# EAGLE board Final_PCB (EAGLE 8.6.2)
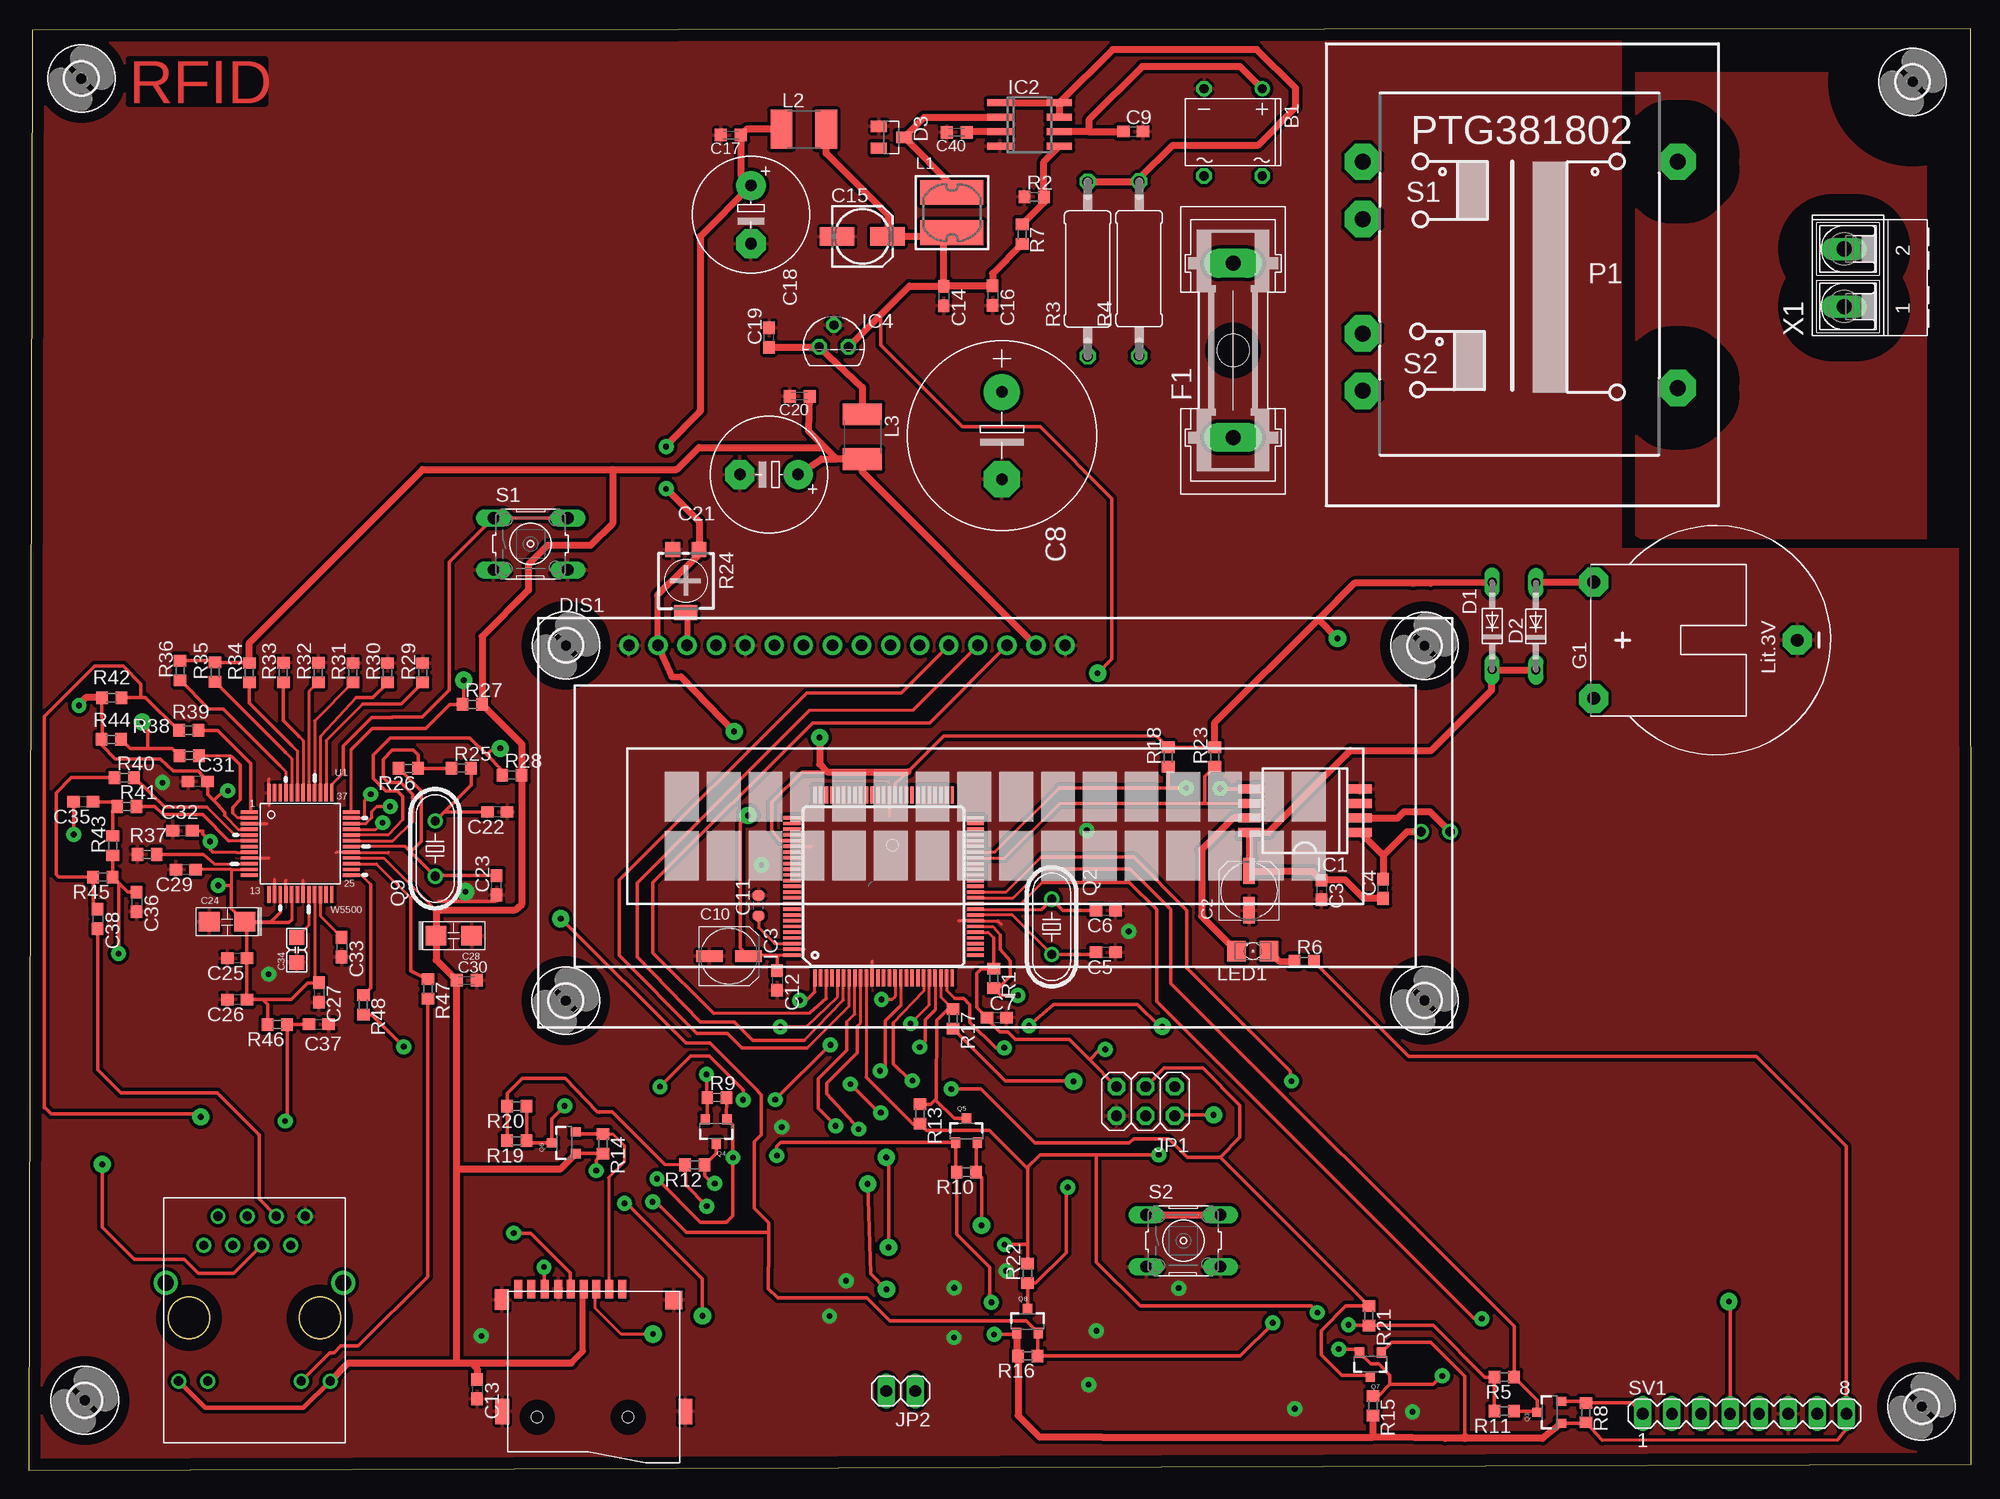
[diagram p0: board, top side]
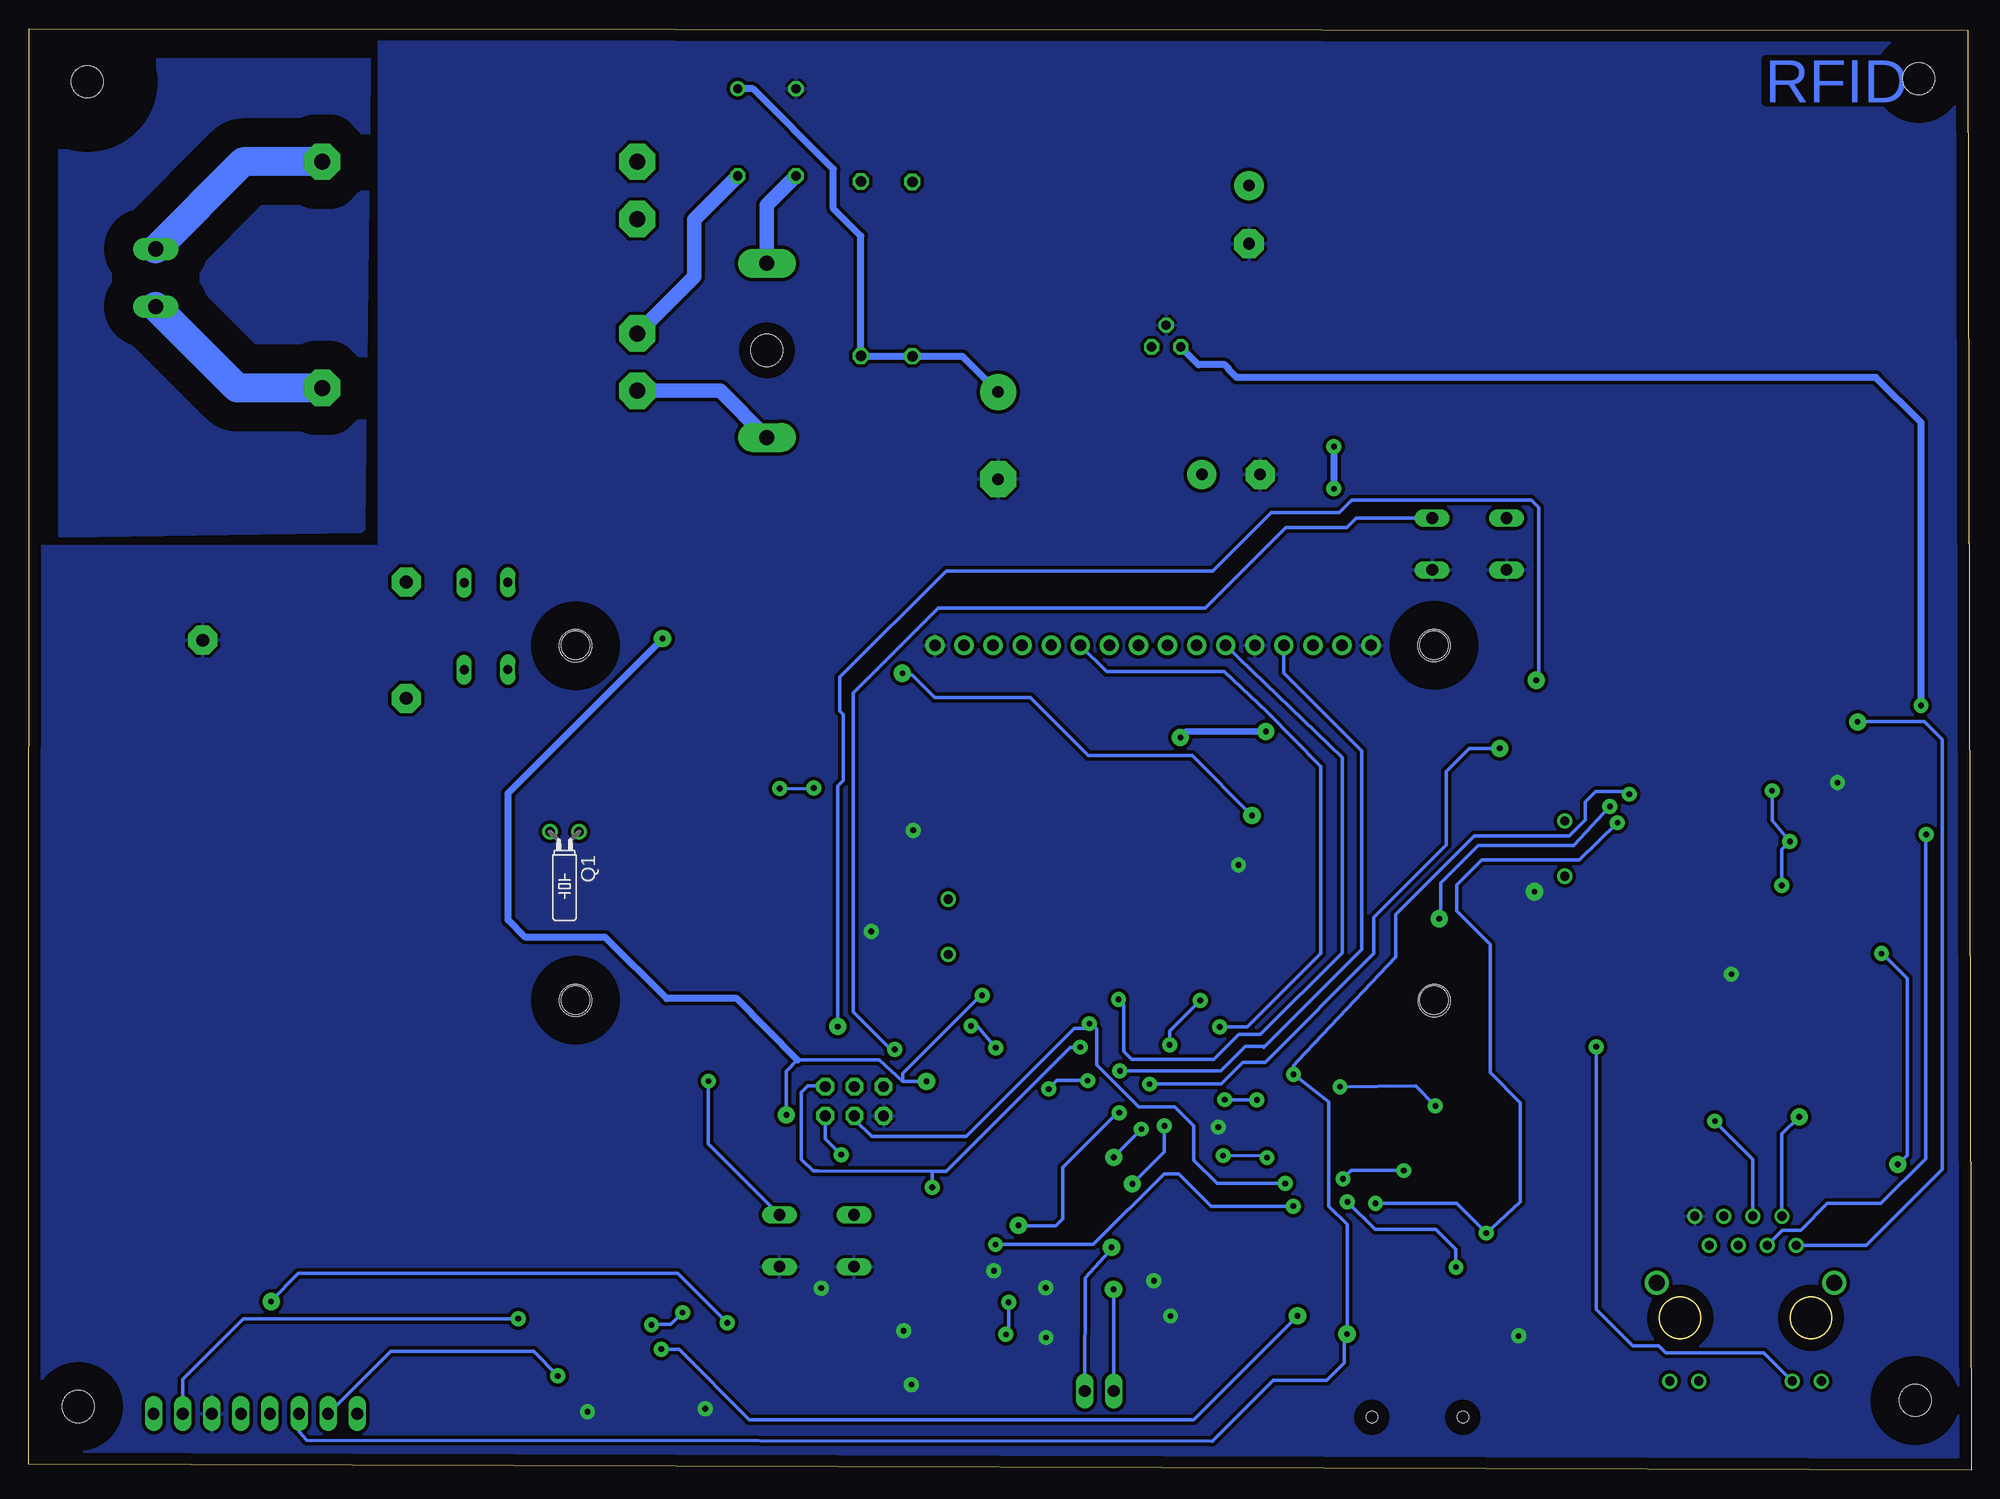
[diagram p1: board, bottom side, seen from below]

Size 169.7 x 125.96 mm. Coordinates in mm from the lower left corner, seen from the top.
Outline: 0,0 169.7,0.51 169.63,125.96 0.31,125.81 0,0
Copper layers (1*16): Top 0.035mm / dielectric 1.5mm / Bottom 0.035mm
Design rules "default *": minimum track width 0.25mm, minimum drill 0.5mm, track to track 8mil, track to pad 9mil, pad to pad 8mil, via to via 10mil, smd to smd 10mil, copper to edge 40mil, drill to drill 10mil, minimum pad ring 10mil, minimum via ring 8mil, stop-mask expansion 4mil, vias tented up to drill 0mil, thermal gap 10mil
Net classes: 1 power: width 0.152 mm, drill 0.61 mm, clearance 0.152 mm; 2 gnd: width 0.305 mm, drill 0.406 mm, clearance 0.203 mm; 3 power usb: width 0.508 mm, drill 0.406 mm, clearance 0.203 mm

## Footprints (pad centres in the part's own frame; a part is rotated, then mirrored left to right if it is on the bottom)
DB = drill 0.813: + -2.54,-3.81 | drill 0.813 octagon: - 2.54,-3.81; AC1 2.54,3.81; AC2 -2.54,3.81
UD-5X5,8_NICHICON = smd 2.3 x 1: + 1.725,0; - -1.7,0
C0603 = smd 1.1 x 1: 1 -0.85,0; 2 0.85,0
E7,5-16 = drill 1.016 pad 3.15: + -3.81,0 | drill 1.016 pad 3.15 octagon: - 3.81,0
C0603-ROUND = smd 0.898 x 1.1: 1 -0.889,0; 2 0.889,0
153CLV-0505 = smd 3 x 1.6: + 2.2,0; - -2.2,0
C0603K = smd 1.05 x 1.08: 1 -0.875,0; 2 0.875,0
E5-10,5 = drill 1.016 pad 2.54: + -2.54,0 | drill 1.016 pad 2.54 octagon: - 2.54,0
C-3216(TANTAL) = smd 1.8 x 1.7: 1 1.55,0; 2 -1.55,0
C-2012 = smd 1.3 x 1.3: P$1 -1.1,0; P$2 1.1,0
DO34-7 = drill 0.813 long: A 3.81,0; C -3.81,0
SOT23 = smd 1 x 1.4: 1 -0.95,-1.1; 2 0.95,-1.1; 3 0,1.1
TUXGR_16X2_R2 = drill 1 pad 1.676: 1 -32,15.5; 2 -29.46,15.5; 3 -26.92,15.5; 4 -24.38,15.5; 5 -21.84,15.5; 6 -19.3,15.5; 7 -16.76,15.5; 8 -14.22,15.5; 9 -11.68,15.5; 10 -9.14,15.5; 11 -6.6,15.5; 12 -4.06,15.5; 13 -1.52,15.5; 14 1.02,15.5; 15 3.56,15.5; 16 6.1,15.5 | hole 2.5: -37.5,-15.5; 37.5,-15.5; -37.5,15.5; 37.5,15.5
GSH15 = drill 1.321 pad 2.54 long: 1 -7.62,0; 2 7.62,0 | hole 2.794: 0,0
CR2032H = drill 1.118 pad 2.54 octagon: + 5.08,10.795; +@1 -5.08,10.795; - 0,-6.985
2,8 = hole 2.8: 0,0
SO8-7_5 = smd 0.8 x 2: 1 -1.905,-4.845; 2 -0.635,-4.845; 3 0.635,-4.845; 4 1.905,-4.845; 5 1.905,4.845; 6 0.635,4.845; 7 -0.635,4.845; 8 -1.905,4.845
SOIC8 = smd 0.6 x 2.2: 1 -1.905,-2.6; 2 -0.635,-2.6; 3 0.635,-2.6; 4 1.905,-2.6; 5 1.905,2.6; 6 0.635,2.6; 7 -0.635,2.6; 8 -1.905,2.6
TQFP100 = smd 1.5 x 0.3: 1 -8,6; 2 -8,5.5; 3 -8,5; 4 -8,4.5; 5 -8,4; 6 -8,3.5; 7 -8,3; 8 -8,2.5; 9 -8,2; 10 -8,1.5; 11 -8,1; 12 -8,0.5; 13 -8,0; 14 -8,-0.5; 15 -8,-1; 16 -8,-1.5; 17 -8,-2; 18 -8,-2.5; 19 -8,-3; 20 -8,-3.5; 21 -8,-4; 22 -8,-4.5; 23 -8,-5; 24 -8,-5.5; 25 -8,-6; 51 8,-6; 52 8,-5.5; 53 8,-5; 54 8,-4.5; 55 8,-4; 56 8,-3.5; 57 8,-3; 58 8,-2.5; 59 8,-2; 60 8,-1.5; 61 8,-1; 62 8,-0.5; 63 8,0; 64 8,0.5; 65 8,1; 66 8,1.5; 67 8,2; 68 8,2.5; 69 8,3; 70 8,3.5; 71 8,4; 72 8,4.5; 73 8,5; 74 8,5.5; 75 8,6 | smd 0.3 x 1.5: 26 -6,-8; 27 -5.5,-8; 28 -5,-8; 29 -4.5,-8; 30 -4,-8; 31 -3.5,-8; 32 -3,-8; 33 -2.5,-8; 34 -2,-8; 35 -1.5,-8; 36 -1,-8; 37 -0.5,-8; 38 0,-8; 39 0.5,-8; 40 1,-8; 41 1.5,-8; 42 2,-8; 43 2.5,-8; 44 3,-8; 45 3.5,-8; 46 4,-8; 47 4.5,-8; 48 5,-8; 49 5.5,-8; 50 6,-8; 76 6,8; 77 5.5,8; 78 5,8; 79 4.5,8; 80 4,8; 81 3.5,8; 82 3,8; 83 2.5,8; 84 2,8; 85 1.5,8; 86 1,8; 87 0.5,8; 88 0,8; 89 -0.5,8; 90 -1,8; 91 -1.5,8; 92 -2,8; 93 -2.5,8; 94 -3,8; 95 -3.5,8; 96 -4,8; 97 -4.5,8; 98 -5,8; 99 -5.5,8; 100 -6,8
TO92 = drill 0.813 octagon: 1 -1.27,0; 2 0,1.905; 3 1.27,0
2X03 = drill 0.95 pad 1.55 octagon: 1 -2.54,-1.27; 2 -2.54,1.27; 3 0,-1.27; 4 0,1.27; 5 2.54,-1.27; 6 2.54,1.27
1X02 = drill 1.016 long: 1 -1.27,0; 2 1.27,0
CD54 = smd 5.5 x 2.15: 1 0,1.75; 2 0,-1.75
L1812 = smd 1.9 x 3.4: 1 -1.95,0; 2 1.95,0
LED_1206 = smd 1.6 x 1.803: A -1.422,0; C 1.422,0
TC26H = drill 0.813: 1 -1.27,0; 2 1.27,0
HC49/S = drill 0.813: 1 -2.413,0; 2 2.413,0
SOT23-3 = smd 0.8 x 0.9: 1 -0.95,-1; 2 0.95,-1; 3 0,1.1
R0603 = smd 1 x 1.1: 1 -0.85,0; 2 0.85,0
0411/15 = drill 0.914 octagon: 1 -7.62,0; 2 7.62,0
RTRIM4G/J = smd 1.3 x 1.3: 1 -1.15,-2.75; 3 1.15,-2.75 | smd 2 x 1.3: 2 0,2.75
B3F-10XX = drill 1.016 long: 1 -3.251,2.261; 2 3.251,2.261; 3 -3.251,-2.261; 4 3.251,-2.261
MA08-1 = drill 1.016 long: 1 -8.89,0; 2 -6.35,0; 3 -3.81,0; 4 -1.27,0; 5 1.27,0; 6 3.81,0; 7 6.35,0; 8 8.89,0
VR12 = drill 1.397 pad 3.175 octagon: 1 5.817,13.437; 2 -13.945,13.437; 3 6.071,-14.072; 4 1.067,-14.072; 5 -8.941,-14.072; 6 -13.945,-14.072
W5500 = smd 1.5 x 0.3: 1 -4.45,2.75; 2 -4.45,2.25; 3 -4.45,1.75; 4 -4.45,1.25; 5 -4.45,0.75; 6 -4.45,0.25; 7 -4.45,-0.25; 8 -4.45,-0.75; 9 -4.45,-1.25; 10 -4.45,-1.75; 11 -4.45,-2.25; 12 -4.45,-2.75; 25 4.45,-2.75; 26 4.45,-2.25; 27 4.45,-1.75; 28 4.45,-1.25; 29 4.45,-0.75; 30 4.45,-0.25; 31 4.45,0.25; 32 4.45,0.75; 33 4.45,1.25; 34 4.45,1.75; 35 4.45,2.25; 36 4.45,2.75 | smd 0.3 x 1.5: 13 -2.75,-4.45; 14 -2.25,-4.45; 15 -1.75,-4.45; 16 -1.25,-4.45; 17 -0.75,-4.45; 18 -0.25,-4.45; 19 0.25,-4.45; 20 0.75,-4.45; 21 1.25,-4.45; 22 1.75,-4.45; 23 2.25,-4.45; 24 2.75,-4.45; 37 2.75,4.45; 38 2.25,4.45; 39 1.75,4.45; 40 1.25,4.45; 41 0.75,4.45; 42 0.25,4.45; 43 -0.25,4.45; 44 -0.75,4.45; 45 -1.25,4.45; 46 -1.75,4.45; 47 -2.25,4.45; 48 -2.75,4.45
RJ45 = drill 0.8: G+ 5.84,-6.305; G- 5.84,-3.765; GND -8.57,4.76; NC -6.03,3.5; P4 -8.57,-0.32; P5 -6.03,0.96; RD+ -6.03,-1.58; RD- -8.57,2.22; TD+ -6.03,-4.12; TD- -8.57,-2.86; Y+ 5.84,6.945; Y- 5.84,4.405 | drill 1.4: SHIELD1 -2.73,-7.425; SHIELD2 -2.73,8.065
C12075 = smd 0.7 x 1.6: 1 2.5,7.7; 2 1.35,7.7; 3 0.2,7.7; 4 -0.9,7.7; 5 -2,7.7; 6 -3.1,7.7; 7 -4.3,7.7; 8 -5.45,7.7; CD -6.6,7.7 | smd 1.2 x 1.8: GND@1 -8.05,6.77 | smd 1.2 x 2.2: GND@2 -8,-3; GND@4 8,-3 | smd 1.5 x 1.6: GND@3 6.99,6.75 | hole 1: -4.95,-3.5; 3,-3.5; 3,-3.5
AK500/2-H = drill 1.321 long: 1 -2.515,0; 2 2.515,0

## Placement (x,y rotation side)
B1  DF01S  [DB]  105.21,116.9 180 top
C2  4,7 uF  [UD-5X5,8_NICHICON]  106.61,50.63 90 top
C3  100n  [C0603]  112.93,50.7 270 top
C4  100n  [C0603]  118.32,50.8 90 top
C5  18p  [C0603]  94.09,45.24 180 top
C6  18p  [C0603]  94.09,48.9 180 top
C7  22p  [C0603]  84.56,39.55 0 top
C8  470u  [E7,5-16]  85.02,90.4 270 top
C9  100n  [C0603]  96.48,116.97 0 top
C10  22u  [UD-5X5,8_NICHICON]  61.17,44.91 0 top
C11  100n  [C0603-ROUND]  63.76,49.33 90 top
C12  100n  [C0603]  65.39,42.78 270 top
C13  100n  [C0603]  39.17,7.09 270 top
C14  100n  [C0603]  79.94,102.6 270 top
C15  47u  [153CLV-0505]  72.83,107.8 0 top
C16  10u  [C0603]  84.21,102.62 270 top
C17  100n  [C0603K]  61.35,116.67 180 top
C18  10u LOW ESR  [E5-10,5]  63.1,109.71 270 top
C19  10u  [C0603]  64.67,98.96 90 top
C20  100n  [C0603K]  67.34,93.83 180 top
C21  10u LOW ESR  [E5-10,5]  64.67,87 180 top
C22  18p  [C0603]  40.95,57.51 180 top
C23  18p  [C0603]  40.87,51.11 90 top
C24  10uF/16V  [C-3216(TANTAL)]  17.33,47.91 0 top
C25  100n  [C0603]  18.22,44.73 180 top
C26  100n  [C0603]  18.22,41.13 180 top
C27  100n  [C0603]  25.36,41.74 270 top
C28  10uF/16V  [C-3216(TANTAL)]  37.14,46.69 180 top
C29  100n  [C0603]  13.72,52.48 180 top
C30  100n  [C0603K]  38.26,42.8 0 top
C31  100n  [C0603]  14.79,60.18 180 top
C32  100n  [C0603]  13.44,55.86 180 top
C33  10n  [C0603]  27.34,45.7 270 top
C34  4.7uF  [C-2012]  23.42,45.45 90 top
C35  6.8n  [C0603]  4.78,58.4 180 top
C36  10n  [C0603]  9.43,49.66 270 top
C37  22n  [C0603]  25.36,38.97 0 top
C38  6.8n  [C0603]  6.03,48.16 270 top
C40  750p  [C0603K]  81.06,116.9 180 top
D1  BAT81  [DO34-7]  127.84,73.77 90 top
D2  BAT81  [DO34-7]  131.65,73.74 90 top
D3  BAS40  [SOT23]  75.37,116.46 270 top
DIS1  TUXGR_16X2_R2  [TUXGR_16X2_R2]  84.44,56.57 0 top
F1  1A  [GSH15]  105.21,97.85 90 top
G1  CR2032H  [CR2032H]  147.5,72.52 90 top
H1  MOUNT-HOLE2.8  [2,8]  165.36,5.57 0 top
H2  MOUNT-HOLE2.8  [2,8]  121.93,72.04 0 top
H3  MOUNT-HOLE2.8  [2,8]  4.91,6.1 0 top
H4  MOUNT-HOLE2.8  [2,8]  121.93,41.05 0 top
H5  MOUNT-HOLE2.8  [2,8]  46.92,41.03 0 top
H6  MOUNT-HOLE2.8  [2,8]  46.95,72.06 0 top
H7  MOUNT-HOLE2.8  [2,8]  164.57,121.32 0 top
H8  MOUNT-HOLE2.8  [2,8]  4.6,121.59 0 top
IC1  PCF8583T  [SO8-7_5]  111.49,57.61 90 top
IC2  MC34063AD  [SOIC8]  87.43,117.58 270 top
IC3  ATMEGA2560-16AU  [TQFP100]  74.68,51.01 90 top
IC4  MCP1700-3302E  [TO92]  70.34,98.15 0 top
JP1  3x2M  [2X03]  97.57,32.24 180 top
JP2  D5  [1X02]  76.18,6.91 180 top
L1  220 uH  [CD54]  80.65,109.89 0 top
L2  47uH 0,21A  [L1812]  67.72,117.17 0 top
L3  47uH/ 210mA  [L1812]  72.83,90.3 270 top
LED1  1206 SMD  [LED_1206]  106.94,45.34 180 top
Q1  32.768 KHz  [TC26H]  122.89,55.78 180 bottom
Q2  16 MHz  [HC49/S]  89.36,47.48 270 top
Q3  BSS138  [SOT23-3]  132.87,5.06 90 top
Q4  BSS138  [SOT23-3]  60.05,29.65 180 top
Q5  BSS138  [SOT23-3]  81.92,29.62 0 top
Q6  BSS138  [SOT23-3]  46.79,28.61 90 top
Q7  BSS138  [SOT23-3]  117.2,9.28 180 top
Q8  BSS138  [SOT23-3]  87.26,12.98 0 top
Q9  25 MHz  [HC49/S]  35.52,54.31 90 top
R1  10k  [R0603]  84.31,42.96 270 top
R2  1k  [R0603]  87.84,111.26 0 top
R3  1,5  [0411/15]  92.51,104.96 90 top
R4  1,5  [0411/15]  97.01,104.98 90 top
R5  4.7K  [R0603]  128.91,8.13 180 top
R6  330R  [R0603]  111.41,44.45 0 top
R7  3k  [R0603]  86.8,108.01 270 top
R8  10k  [R0603]  136.02,5.03 270 top
R9  10k  [R0603]  60.13,32.57 0 top
R10  10k  [R0603]  81.92,26.04 180 top
R11  10k  [R0603]  128.89,5.16 180 top
R12  10k  [R0603]  58.2,26.67 180 top
R13  10k  [R0603]  77.86,31.12 270 top
R14  10k  [R0603]  50.17,28.53 270 top
R15  10k  [R0603]  117.43,5.62 270 top
R16  10k  [R0603]  87.28,9.99 180 top
R17  4.7K  [R0603]  80.75,39.43 270 top
R18  10k  [R0603]  99.55,62.31 90 top
R19  4.7K  [R0603]  42.63,28.78 180 top
R20  10k  [R0603]  42.65,31.81 180 top
R21  10k  [R0603]  117.07,13.49 270 top
R22  10k  [R0603]  87.26,17.2 90 top
R23  10k  [R0603]  103.61,62.34 90 top
R24  10k  [RTRIM4G/J]  57.41,77.7 180 top
R25  0R  [R0603]  37.8,61.35 0 top
R26  1M  [R0603]  33.18,61.32 180 top
R27  10k  [R0603]  38.77,66.91 0 top
R28  10k  [R0603]  42.22,60.74 0 top
R29  10k  [R0603]  34.42,69.68 90 top
R30  10k  [R0603]  31.35,69.68 90 top
R31  10k  [R0603]  28.33,69.68 90 top
R32  10k  [R0603]  25.3,69.7 90 top
R33  10k  [R0603]  22.26,69.7 90 top
R34  10k  [R0603]  19.28,69.68 90 top
R35  10k  [R0603]  16.29,69.73 90 top
R36  10k  [R0603]  13.24,69.88 90 top
R37  12.4k 1%  [R0603]  10.34,53.8 0 top
R38  33R  [R0603]  14.03,62.44 0 top
R39  33R  [R0603]  13.98,64.65 0 top
R40  33R  [R0603]  8.36,60.51 0 top
R41  33R  [R0603]  8.59,57.99 0 top
R42  49R9 1%  [R0603]  7.25,67.49 180 top
R43  49R9 1%  [R0603]  7.35,54.56 90 top
R44  49R9 1%  [R0603]  7.22,63.86 180 top
R45  49R9 1%  [R0603]  6.48,51.82 180 top
R46  10R 1%  [R0603]  21.72,38.94 180 top
R47  330R  [R0603]  34.88,42.04 270 top
R48  330R  [R0603]  29.24,40.64 270 top
S1  SW3  [B3F-10XX]  43.85,80.93 0 top
S2  SW  [B3F-10XX]  100.87,20.05 0 top
SV1  RC522  [MA08-1]  149.89,4.93 0 top
TR1  PTG383002  [VR12]  130.61,100.39 270 top
U1  W5500  [W5500]  23.73,54.74 0 top
U$1  HR911105A  [RJ45]  19.4,13.63 270 top
U$2  MICROSD  [C12075]  49.37,8.13 0 top
X1  230V  [AK500/2-H]  158.6,104.2 90 top

## Library data of the parts
B1 = rectifier
C2-C10 C12-C23 C25-C27 C29-C33 C35-C38 C40 = rcl; SPICEPREFIX: C
C11 IC3 JP1 = SmartPrj
C24 C28 = CAP; SPICEPREFIX: C
C34 = CAP
D1-D3 = diode
DIS1 = display-lcd; OC_FARNELL: unknown; OC_NEWARK: unknown; SPICEPREFIX: X
F1 = fuse; MPN: 64900001039; OC_FARNELL: 1271673; OC_NEWARK: 02P0318
G1 = battery
H1-H8 = holes
IC1 = ds1307_pcf8583
IC2 = mc34063
IC4 = linear
JP2 = pinhead
L1 = inductor-sumida
L2 L3 = rcl; SPICEPREFIX: L
LED1 = eagle-ltspice; SPICEMODEL: NONE; SPICEPREFIX: D; SPICETYPE: diode
Q1 = crystal; OC_FARNELL: unknown; OC_NEWARK: unknown
Q2 Q9 = crystal; OC_FARNELL: 1667008; OC_NEWARK: unknown
Q3-Q8 = SparkFun
R1-R23 R25-R48 = rcl; SPICEPREFIX: R
R24 = resistor
S1 S2 = switch-omron; MPN: B3F-1000; OC_FARNELL: 176432; OC_NEWARK: 36M3542
SV1 = con-lstb; OC_FARNELL: unknown; OC_NEWARK: unknown
TR1 = trafo_inżynierka; SPICEPREFIX: X
U1 = W5500
U$1 = HR911105A
U$2 = micro-sd
X1 = con-ptr500; OC_FARNELL: unknown; OC_NEWARK: unknown

## Nets
3.3_CS_ETH(D10): Q5.2 R10.1 R28.1 U1.32
3.3_CS_RFID: Q3.2 R8.1 SV1.1
3.3_CS_SD(D4): Q6.2 R14.1 U$2.2
3.3_MISO: Q8.2 R16.1 SV1.4 U1.34 U$2.7
3.3_MOSI: Q4.2 R9.1 SV1.3 U1.35 U$2.3
3.3_SCK: Q7.2 R15.1 SV1.2 U1.33 U$2.5
5_CS_ETH(D10): IC3.23 Q5.3 R13.1 R17.1
5_CS_SD(D4): IC3.1 Q6.3 R19.1 R20.1
5_MISO: IC3.22 JP1.1 Q8.3 R22.1
5_MOSI: IC3.21 JP1.4 Q4.3 R12.1
5_SCK: IC3.20 JP1.3 Q7.3 R21.1
+3V3: C19.1 C24.1 C25.1 C26.1 C27.1 C29.1 C31.1 C32.1 IC4.1 L3.1 R42.2 R44.2 R46.2 U1.4 U1.8 U1.11 U1.15 U1.17 U1.21
+5V: C10.+ C12.1 C14.1 C15.+ C16.1 IC3.100 IC4.3 L1.2 L2.2 R7.2
ALED: R47.1 U1.27
AREF: C11.1 IC3.98
CS_RFID: IC3.36 Q3.3 R5.1 R11.1
D4: DIS1.11 IC3.5
D5: DIS1.12 IC3.7
D6: DIS1.13 IC3.6
D7: DIS1.14 IC3.3
E: DIS1.6 IC3.15
GND: B1.- C2.- C3.2 C5.1 C6.1 C7.2 C8.- C9.2 C10.- C11.2 C12.2 C13.2 C14.2 C15.- C16.2 C17.2 C18.- C19.2 C20.2 C21.- C22.1 C23.1 C24.2 C25.2 C26.2 C27.2 C28.2 C29.2 C30.2 C31.2 C32.2 C33.2 C34.P$1 C36.2 C37.2 C40.2 D3.1 DIS1.1 DIS1.5 DIS1.16 G1.- IC1.4 IC2.4 IC3.11 IC3.32 IC3.62 IC3.81 IC3.99 IC4.2 JP1.6 R2.1 R24.3 R29.2 R30.2 R31.2 R32.2 R33.2 R37.1 S1.3 S1.4 S2.3 S2.4 SV1.6 U1.3 U1.9 U1.14 U1.16 U1.19 U1.29 U1.48 U$1.GND U$2.6 U$2.GND@1 U$2.GND@2 U$2.GND@3 U$2.GND@4
INT5: IC3.24 R27.1 U1.36
LLED: R48.1 U1.25
N$1: IC1.7 LED1.C
N$2: R29.1 U1.38
N$3: IC2.5 R2.2 R7.1
N$4: IC2.1 IC2.7 IC2.8 R3.2 R4.2
N$5: D3.3 IC2.2 L1.1
N$6: C40.1 IC2.3
N$7: TR1.1 X1.1
N$8: TR1.2 X1.2
N$9: B1.AC1 F1.2
N$10: B1.AC2 TR1.4
N$11: F1.1 TR1.3
N$12: B1.+ C8.+ C9.1 IC2.6 R3.1 R4.1
N$13: R47.2 U$1.Y-
N$14: R41.2 U1.6
N$15: DIS1.3 R24.2
N$16: R30.1 U1.39
N$17: R31.1 U1.40
N$18: C22.2 Q9.2 R25.2
N$19: IC3.9 JP2.1
N$20: IC3.8 JP2.2
N$21: R48.2 U$1.G-
N$26: IC3.37 S2.1 S2.2
N$27: C4.2 IC1.1 Q1.1
N$28: IC1.2 Q1.2
N$29: D2.A G1.+
N$31: C2.+ C3.1 C4.1 D1.C D2.C IC1.8
N$41: R32.1 U1.41
N$42: R33.1 U1.42
N$43: R34.1 U1.43
N$44: R35.1 U1.44
N$45: R36.1 U1.45
N$46: C34.P$2 U1.20
N$47: C33.1 U1.22
N$48: R37.2 U1.10
N$49: C37.1 R46.1 U$1.P4
N$50: C35.2 U$1.RD+
N$51: C38.2 U$1.RD-
N$52: C36.1 R43.1 R45.1 U$1.P5
N$54: LED1.A R6.1
N$58: R25.1 R26.1 U1.31
N$60: R40.2 U1.5
N$61: R38.2 U1.2
N$62: R39.2 U1.1
N$63: C23.2 Q9.1 R26.2 U1.30
RESET: C7.1 IC3.30 JP1.5 R1.1 S1.1 S1.2 U1.37
RESET_RFID: IC3.35 SV1.7
RS: DIS1.4 IC3.16
RXN: C38.1 R40.1 R45.2
RXP: C35.1 R41.1 R43.2
SCL: IC1.6 IC3.43 R23.1
SDA: IC1.5 IC3.44 R18.1
TXN: R39.1 R42.1 U$1.TD-
TXP: R38.1 R44.1 U$1.TD+
V+: C13.1 C20.1 C21.+ C28.1 C30.1 DIS1.15 L3.2 Q3.1 Q4.1 Q5.1 Q6.1 Q7.1 Q8.1 R6.2 R8.2 R9.2 R10.2 R14.2 R15.2 R16.2 R27.2 R28.2 R34.2 R35.2 R36.2 SV1.8 U1.28 U$1.G+ U$1.Y+ U$2.4
VDD: C17.1 C18.+ D1.A DIS1.2 IC3.10 IC3.31 IC3.61 IC3.80 JP1.2 L2.1 R1.2 R5.2 R11.2 R12.2 R13.2 R17.2 R18.2 R19.2 R20.2 R21.2 R22.2 R23.2 R24.1
XTAL1: C6.2 IC3.34 Q2.1
XTAL2: C5.2 IC3.33 Q2.2

## Tracks (layer width: path | path; a pad name or v marks a point on that pad's centre or on a via)
3.3_CS_ETH(D10)  (via drill 0.5 pad 1.3, 0.5 pad 1.5)
  Top 0.25: 32.67,56.88 31.41,55.49 U1.32
  Top 0.305: R28.1 41.37,61.15 40.01,62.51 | 40.01,62.51 38.54,63.99 31.6,63.99 30.1,62.49 30.1,60.43 31.2,59.34 32.21,59.34 32.67,58.88 32.67,56.88 | Q5.2 82.77,28.52 R10.1 83.24,25.57 v83.24,21.39 | 40.01,62.51 40.57,63.07 v41.2,63.07 | v71.79,33.74 74.29,31.23 v74.44,31.23
  Bottom 0.305: v41.2,63.07 43.85,63.07 45.85,61.07 45.85,54.64 52.2,48.29 52.2,45.14 61.7,35.64 63.63,35.64 65.51,33.76 71.61,33.74 v71.79,33.74 | v83.24,21.39 83.24,21.34 79.99,21.34 79.36,21.98 79.36,26.47 74.59,31.23 v74.44,31.23
3.3_CS_RFID
  Top 0.305: SV1.1 140.05,5.88 R8.1 135.9,6.01 Q3.2
3.3_CS_SD(D4)
  Top 0.254: R14.1 51.02,29.38 52.05,28.35 52.05,26.96 50.66,25.57 50.66,15.89 U$2.2
  Top 0.305: R14.1 47.97,29.38 Q6.2
3.3_MISO  (via drill 0.5 pad 1.3, 0.5 pad 1.5)
  Top 0.25: U1.34 29.46,56.49 29.98,57.02 29.98,57.55 30.43,57.99 30.64,57.99
  Top 0.254: U$2.7 45.07,15.88 45.02,15.93
  Top 0.305: 30.64,57.99 v31.58,57.99 | 64.65,20.77 64.65,21.62 63.38,22.89 63.38,28.68 64.01,29.32 64.01,32.8 63.38,33.43 59.52,37.34 57.39,37.34 v46.49,48.19 | 64.65,20.77 64.65,17.77 64.62,17.75 64.62,15.85 65.44,15.04 73.21,15.04 75.22,13.03 87.15,13.03 Q8.2 88.13,11.91 R16.1 105.85,9.99 108.74,12.88 | 108.84,12.98 108.74,12.88 | 108.74,12.88 v108.67,12.88 | v148.52,14.74 148.62,14.64 SV1.4 | 64.65,20.77 57.45,20.77 54.77,23.45 v54.5,23.45 54.37,23.45 54.35,23.43 | 45.02,15.93 v45.02,17.74
  Bottom 0.305: v31.58,57.99 34.73,54.59 43.09,54.59 46.36,51.31 46.36,48.32 v46.49,48.19 | v108.67,12.88 112.98,17.2 146.13,17.2 148.57,14.76 148.55,14.76 v148.52,14.74 | v54.5,23.45 52.09,21.04 46.78,21.04 45.04,19.3 45.04,17.64 v45.02,17.74
3.3_MOSI  (via drill 0.5 pad 1.3, 0.5 pad 1.5)
  Top 0.25: U1.35 29.16,56.99 29.37,57.21 29.37,58.56 v29.88,59.06
  Top 0.254: v54.54,11.89 54.53,11.91 51.73,11.91 49.51,14.13 49.51,15.77 U$2.3
  Top 0.305: 59.08,32.37 R9.1 | R9.1 59.28,30.82 Q4.2 | v59.21,34.57 59.26,32.61 R9.1
  Bottom 0.305: SV1.3 146.08,3.36 145.4,2.6 66.3,2.52 60.97,7.85 56.29,7.85 54.77,9.38 54.77,11.46 54.62,11.61 v54.54,11.89 54.54,21.47 56.12,23.04 56.12,32.19 v59.21,34.57 59.19,35.39 58.83,35.77 50.3,44.84 50.3,48.57 43.44,55.43 35.13,55.43 33.74,56.82 33.74,58.37 32.82,59.29 30.1,59.29 v29.88,59.06
3.3_SCK  (via drill 0.5 pad 1.3, 0.5 pad 1.5)
  Top 0.25: U1.33 30.34,55.99 v30.92,56.57
  Top 0.305: 118.9,7.5 118.9,8.31 117.94,9.28 117.25,9.28 Q7.2 115.96,10.57 v114.43,10.57 | 118.9,7.5 117.87,6.47 R15.1 | 118.9,7.5 122.71,7.5 123.63,8.41 v123.48,8.23 | v42.38,20.72 43.85,20.72 47.31,17.26 47.31,15.89 U$2.5 | v58.86,13.49 58.86,16.7 52.24,23.32 v52.05,23.32
  Bottom 0.305: v30.92,56.57 34.27,53.32 42.78,53.32 44.96,51.13 44.96,48.87 42.04,45.95 42.04,34.75 39.4,32.11 39.42,23.43 41.83,21.16 42.19,20.81 42.24,20.81 42.33,20.72 | 58.73,13.57 58.83,13.47 v58.86,13.49 67.93,4.42 106.74,4.42 112.88,10.57 v114.43,10.57 | v123.48,8.23 125.56,10.39 138.08,10.39 SV1.2 | 42.33,20.72 v42.38,20.72 | v52.05,23.32 44.93,23.32 42.33,20.72
5_CS_ETH(D10)
  Top 0.25: IC3.23 79.69,41.34 R17.1
  Top 0.305: R17.1 80.31,40.28 79.33,39.3 79.33,37.75 79.28,34.17 79.28,32.45 79.2,32.37 | R13.1 78.8,31.97 79.2,32.37 | 79.2,32.37 80.85,30.72 Q5.3
5_CS_SD(D4)  (via drill 0.5 pad 1.3)
  Top 0.25: 68.68,41.81 IC3.1
  Top 0.305: R20.1 43.5,28.81 R19.1 43.66,28.61 Q6.3 45.69,30.71 v46.82,31.83 | v70.03,37.16 v65.22,32.38 65.21,32.36 | v55.15,33.51 57.84,36.2 59.44,36.2 62.41,33.23 v62.41,32.36 | v67.37,41.05 67.93,41.05 68.68,41.81
  Bottom 0.305: v46.82,31.83 48.55,33.56 v55.15,33.51 | v62.41,32.36 64.93,32.36 65.18,32.39 v65.22,32.38 | v70.03,37.16 70.03,38.38 v67.37,41.05
5_MISO  (via drill 0.5 pad 1.3)
  Top 0.25: IC3.22 79.18,40.22
  Top 0.305: Q8.3 R22.1 87.98,16.35 90.63,19 90.63,24.59 v90.76,24.72 | 79.18,40.22 78.31,39.35 78.31,37.44 v77.83,36.96
  Bottom 0.305: JP1.1 100.16,33.56 101.66,33.56 102.22,33 102.2,30.28 102.2,27.17 101.17,26.14 100.77,26.14 90.76,26.1 | v77.83,36.96 78.7,36.96 89.55,26.1 90.76,26.1 | v90.76,24.72 90.76,26.1
5_MOSI  (via drill 0.5 pad 1.3)
  Top 0.25: IC3.21 78.68,40.66 v77.04,39.02
  Top 0.305: Q4.3 60.05,27.68 R12.1 59.05,25.7 59.67,25.05 v59.93,25.05
  Bottom 0.305: JP1.4 97.57,30.66 96.07,29.16 87.79,29.16 78.36,38.59 77.48,38.59 v77.04,39.02 76.87,39.02 76.41,38.56 76.41,35.41 72.73,31.73 69.58,31.73 67.93,30.08 67.93,27.08 65.89,25.05 v59.93,25.05
5_SCK  (via drill 0.5 pad 1.3)
  Top 0.25: IC3.20 78.18,41.86 75.52,39.08
  Top 0.305: JP1.3 99.19,35.13 102.55,35.13 105.8,31.88 105.8,29.07 104.07,27.35 | v77.2,34.04 77.02,34.04 75.55,35.51 75.52,39.08 | Q7.3 117.09,8.29 114.71,8.29 112.91,10.09 112.91,12.2 115.06,14.34 R21.1 104.07,27.35 | 104.07,27.35 101.19,27.35 99.57,28.96 96.53,28.96 96.14,28.58 87.89,28.58 83.17,33.3 v80.6,33.3
  Bottom 0.305: v80.6,33.3 80.6,33.33 79.89,34.04 v77.2,34.04
230V
  pour Bottom (isolate 2.54): 140.37,125.4 169.27,125.13 169.45,124.95 169.45,81.92 140.77,82.35 140.24,125.46
+3V3  (via drill 0.5 pad 1.3)
  Top 0.25: U1.15 21.98,48.75 | U1.17 22.98,48.1 | U1.21 24.98,42.96 | 17.69,52.49 17,52.49 C29.1 | U1.8 18.16,53.99 18.14,54.01 16.1,54.01 | 17.15,57.21 18.3,55.99 U1.4 | 17.69,52.49 17.69,51.08 | 17.69,52.49 U1.11
  Top 0.305: 21.98,48.75 21.14,47.91 C24.1 | 22.98,48.1 22.74,47.86 18.93,47.86 C24.1 | C24.1 19.07,47.72 C25.1 C26.1 20.45,41.13 | 24.98,42.96 C27.1 24.4,42.59 22.94,41.13 20.45,41.13 | 17.15,57.21 17.15,57.47 16.48,58.21 16.19,58.51 | C24.1 17.69,49.1 17.69,51.08 v16.57,51.08 | 20.45,41.13 20.87,40.71 R46.2 | R42.2 6.45,63.94 R44.2 6.37,63.36 7.58,62.16 11.51,62.16 12.66,61.09 14.8,61.09 C31.1 15.64,59.06 16.19,58.51 | C32.1 15.22,55.86 15.22,55.61 15.88,54.94 v15.86,54.94 15.86,54.25 16.1,54.01 | 16.19,58.51 17.05,59.36 v17.41,59.36
  Top 0.61: C19.1 68.32,98.11 IC4.1 72.83,94.59 L3.1 | R42.2 5.01,67.49 4.45,66.93 4.45,66.86 v4.4,66.81
  Bottom 0.305: v17.41,59.36 17.41,56.75 v15.86,54.94 16.57,54.23 v16.57,51.08
  Bottom 0.61: IC4.1 67.52,96.6 65.21,96.6 64.88,96.27 64.88,96.17 64.19,95.48 8.34,95.48 4.4,91.55 v4.4,66.81
+5V  (via drill 0.5 pad 1.5)
  Top 0.25: 62.99,45.01 65.59,45.01 | 65.59,45.01 IC3.100 | 65.59,45.01 65.39,44.8
  Top 0.305: 62.99,45.01 C10.+ 62.16,45.65 62.16,56.52 v62.85,57.21 | 65.39,44.8 C12.1 | v93.38,69.63 94.62,70.87 94.62,84.92 88.37,91.17 81.54,91.17 74.42,98.29 74.42,100.96
  Top 0.61: R7.2 84.21,104.56 C16.1 79.97,103.47 | 79.97,103.47 C14.1 79.94,107.42 L1.2 80.32,107.8 C15.+ 75.03,109.69 69.65,115.07 69.67,115.09 L2.2 | IC4.3 74.42,100.96 76.93,103.47 79.97,103.47
  Bottom 0.305: v62.85,57.21 68.08,62.44 77.15,62.44 82.23,67.52 90.53,67.52 92.51,69.5 93.28,69.5 93.28,69.52 v93.38,69.63
ALED
  Top 0.25: U1.27 30.38,52.99 33.38,49.99
  Top 0.305: R47.1 33.38,43.63 33.38,49.99
AREF
  Top 0.25: 63.76,47.93 63.76,47.41 65.16,46.01 IC3.98
  Top 0.305: C11.1 63.76,47.93
CS_RFID
  Top 0.25: IC3.36 86,50.01 88.53,52.53
  Top 0.305: R11.1 131.67,5.16 Q3.3 131.77,6.12 R5.1 129.76,12.57 99.78,42.55 99.78,49 98.91,49.86 98.81,49.97 96.25,52.53 88.53,52.53
D4  (via drill 0.5 pad 1.3)
  Top 0.25: 67.98,38.77 70.67,41.33 70.67,41.62 IC3.5
  Top 0.305: v65.66,38.74 67.98,38.77
  Bottom 0.305: DIS1.11 75.54,69.78 65.26,69.8 61.49,66.24 56.83,61.5 56.85,45.14 63.25,38.74 v65.66,38.74
D5
  Top 0.25: 68.03,36.91 71.68,40.57 IC3.7
  Top 0.305: DIS1.12 76.23,67.92 67.95,67.92 51.59,51.57 51.59,44.99 58.34,38.18 61.04,38.18 62.31,36.91 68.03,36.91
D6
  Top 0.25: 67.77,37.55 71.18,41.08 71.18,42.94
  Top 0.305: DIS1.13 77.27,66.43 68.2,66.37 53.14,51.31 53.14,44.84 58.66,39.17 61.63,39.17 63.25,37.55 67.77,37.55 | 71.18,42.94 IC3.6
D7
  Top 0.25: 69.68,41.23 IC3.3
  Top 0.305: DIS1.14 78.69,65.31 68.51,65.31 54.54,51.34 54.54,45.22 59.85,39.91 68.25,39.93 69.68,41.23
D230V
  pour Top (isolate 3.81): 140.39,125.86 169.37,125.89 169.58,125.68 169.58,81.44 169.55,81.49 140.9,81.49 140.49,81.77 140.49,125.25 140.44,125.79
E  (via drill 0.5 pad 1.3)
  Top 0.25: IC3.15 75.68,41.42 75.39,41.13
  Top 0.305: 75.39,41.13 v74.5,41.13
  Bottom 0.305: DIS1.6 54.97,62.27 54.97,62.26 54.97,45.22 62.11,38.08 63.99,38.08 66.17,35.89 73.34,35.89 74.02,36.58 74.02,40.64 v74.5,41.13
GND  (via drill 0.5 pad 1.3, 0.5 pad 1.5)
  Top 0.25: U1.3 20.81,56.49 | U1.9 21,53.5 | IC3.99 67.76,45.51 | 31.44,53.99 U1.29 26.88,53.99 26.83,53.95 | IC3.62 75.18,57.12 | 81.23,48.01 IC3.32 84.67,48.01 84.97,47.71 | U1.14 21.48,51.64 | U1.16 22.48,51.56 | U1.19 23.98,51.57 | IC3.11 73.68,44.45 | IC3.81 68.33,54.51 | 21.01,60.42 20.98,60.38 U1.48 20.98,58.07
  Top 0.305: 35.8,49.71 40.73,49.71 | 73.68,44.45 73.69,44.45
  other vias: 80.83,11.59 100.46,15.91 38.16,50.55 96.09,47.07 92.44,55.91 93.28,12.17 92.59,7.47 110.6,5.36 80.85,15.93 71.41,16.54 69.96,13.47 65.79,29.98 11.69,60.08 20.96,43.34 120.88,5.11 64.01,52.89 39.55,11.73 85.38,17.42
  pour Top (isolate 0.305): 0.31,125.86 139.02,125.86 139.02,80.42 169.65,80.42 169.56,0.01 0.17,0.01 0.26,125.73
  pour Bottom (isolate 0.305): 139.07,125.38 139.07,80.7 169.73,80.7 169.73,-0.1 0.03,-0.1 0.03,125.96 139.12,125.96 139.12,125.35
INT5  (via drill 0.5 pad 1.3, 0.5 pad 1.5)
  Top 0.25: U1.36 28.17,62.97 | IC3.24 80.18,41.93 80.88,41.23
  Top 0.305: U1.36 | 28.17,62.97 30,64.8 34.68,64.8 36.78,66.91 R27.1 38.01,67 v38.01,69.02 | 80.88,41.23 81.67,41.23 82.23,40.64 82.23,39.12 84.49,36.91 v85.22,36.91 | v87.38,38.82 89.54,40.7 96.86,40.7 98.79,38.77 v99.02,38.77
  Bottom 0.305: v99.02,38.77 99.02,59.8 98.53,60.28 98.53,66.04 98.84,66.35 98.84,69.3 89.57,78.57 66.25,78.57 61.14,83.67 55.2,83.67 54.11,84.76 38.44,84.76 37.78,84.1 37.78,69.25 v38.01,69.02 | v87.38,38.82 86.85,38.82 v85.22,36.91
LLED
  Top 0.25: U1.25 29.07,51.99 29.9,51.16
  Top 0.305: R48.1 29.9,42.16 29.9,51.16
N$1
  Top 0.61: IC1.7 105.21,56.98 102.47,54.23 102.47,48.39 LED1.C
N$2
  Top 0.25: 29.16,66.93 25.98,63.75 U1.38
  Top 0.305: R29.1 32.53,66.93 29.16,66.93
N$3
  Top 0.61: IC2.5 88.69,114.33 R2.2 88.69,110.75 R7.1
N$4
  Top 0.61: IC2.1 IC2.8 | IC2.8 IC2.7 | R3.2 96.98,112.58 | 96.98,112.58 R4.2 | 96.98,112.58 96.98,112.83 99.9,115.75 107.35,115.75 110.65,119.05 110.65,120.78 107.3,124.13 94.68,124.13 IC2.8
N$5
  Top 0.61: IC2.2 78.22,118.22 D3.3 80.65,112.28 L1.1
N$6
  Top 0.61: IC2.3 81.98,116.95 C40.1
N$7
  Bottom 2.54: TR1.1 151.49,94.57 X1.1
N$8
  Bottom 2.54: TR1.2 150.98,114.33 X1.2
N$9
  Bottom 1.27: B1.AC1 105.21,110.55 F1.2
N$10
  Bottom 1.27: TR1.4 111.56,104.3 111.56,109.28 B1.AC2
N$11
  Bottom 1.27: TR1.3 109.3,94.31 F1.1
N$12
  Top 0.61: B1.+ 105.82,122.64 97.26,122.64 92.61,117.99 92.61,116.95 | C9.1 94.15,116.95 92.61,116.95 | 92.61,116.95 IC2.6
  Bottom 0.61: C8.+ 88.14,97.34 R3.1 92.54,97.36 R4.1 97.01,107.83 99.4,110.22 99.4,113.7 106.41,120.71 B1.+
N$13
  Top 0.305: U$1.Y- 26.3,10.27 26.69,10.27 27.27,10.85 28.81,10.85 34.88,16.91 R47.2
N$14
  Top 0.25: U1.6 17.8,54.99 17.77,55 17.48,55
  Top 0.305: 17.48,55 15.22,57.28 11.74,57.28 11.03,57.99 R41.2
N$15
  Top 0.508: R24.2 57.52,75.28 DIS1.3
N$16
  Top 0.25: 28.63,67.52 25.52,64.13 25.48,64.09 U1.39
  Top 0.305: 28.63,67.52 30.05,67.52 31.35,68.76 R30.1
N$17
  Top 0.25: R31.1 24.98,65.48 U1.40
N$18
  Top 0.305: R25.2 38.65,59.86 Q9.2 36.3,57.51 C22.2
N$19  (via drill 0.5 pad 1.3, 0.5 pad 1.5)
  Top 0.25: 72.4,38.77 72.68,39.05 IC3.9
  Top 0.305: v75.11,19.46 75.11,27.13 v74.91,27.34 | v72.5,29.8 72.5,29.82 69.7,32.9 69.7,33.79 72.4,36.48 72.4,38.77
  Bottom 0.305: JP2.1 77.42,16.79 75.29,19.13 75.29,19.28 v75.11,19.46 | 74.86,27.36 74.89,27.36 | 74.89,27.36 v74.91,27.34 | v72.5,29.8 74.89,27.41 74.89,27.36
N$20  (via drill 0.5 pad 1.3, 0.5 pad 1.5)
  Top 0.25: 71.48,39.17 72.18,39.85 IC3.8
  Top 0.305: v73.28,25.02 73.56,17.15 74.94,15.78 | 74.96,15.75 74.94,15.78 | 74.94,15.78 v74.94,15.8 | 70.24,30.33 v70.49,30.08 68.97,31.6 68.97,34.17 71.48,36.68 71.48,39.17
  Bottom 0.305: v74.94,15.8 JP2.2 | v70.49,30.08 70.49,27.82 v73.28,25.02
N$21  (via drill 0.5 pad 1.3)
  Top 0.305: R48.2 29.97,39.79 v32.77,37
  Bottom 0.305: U$1.G- 18.13,10.27 26.69,10.27 27.31,10.89 29.58,10.89 32.77,14.08 v32.77,37
N$26  (via drill 0.5 pad 1.3)
  Top 0.25: IC3.37 85.38,50.51 88.45,53.57
  Top 0.305: 88.45,53.57 96.53,53.57 101.17,48.93 101.17,43.9 110.22,34.85 110.22,34.09 v110.32,33.99
  Top 0.61: S2.1 S2.2
  Bottom 0.305: v110.32,33.99 110.32,28.5 S2.2
N$27
  Top 0.61: IC1.1 118.32,53.72 | 118.32,53.72 C4.2 | Q1.1 120.38,55.78 118.32,53.72
N$28
  Top 0.61: IC1.2 119.59,56.98 120.15,57.54 122.41,57.54 Q1.2
N$29
  Top 0.61: D2.A 131.7,77.6 G1.+
N$31
  Top 0.61: C4.1 116.63,49.95 114.99,51.59 112.97,51.59 C3.1 112.14,52.35 C2.+ 106.64,52.38 IC1.8 108.29,55.71 115.06,62.48 115.32,62.74 115.48,62.9 122.54,62.9 127.79,68.15 127.79,69.93 | D1.C 127.79,69.93 | 127.79,69.93 D2.C
N$41
  Top 0.25: R32.1 24.48,68.03 U1.41
N$42
  Top 0.25: 23.59,64.14 23.98,63.75 U1.42
  Top 0.305: R33.1 22.24,65.49 23.59,64.14 23.59,64.12
N$43
  Top 0.25: 23,63.34 23.48,62.86 U1.43
  Top 0.305: R34.1 19.29,67.05 23,63.34 | 23.48,59.22 U1.43
N$44
  Top 0.25: 22.42,62.74 22.98,62.19 U1.44
  Top 0.305: R35.1 22.42,62.74 22.42,62.73
N$45
  Top 0.25: 21.93,61.6 22.48,61.05 U1.45
  Top 0.305: R36.1 15.75,66.52 17.01,66.52 21.93,61.6
N$46
  Top 0.25: U1.20 24.48,47.6 C34.P$2
N$47
  Top 0.25: U1.22 25.48,48.41 C33.1
N$48
  Top 0.25: 15.27,53.8 16.21,52.99 U1.10
  Top 0.305: R37.2 15.27,53.8 | U1.10
N$49  (via drill 0.5 pad 1.3)
  Top 0.305: C37.1 22.66,38.95 R46.1 22.57,30.67 v22.4,30.5
  Bottom 0.305: v22.4,30.5 19.08,27.18 U$1.P4
N$50  (via drill 0.5 pad 1.3)
  Top 0.305: C35.2 3.93,55.57 v3.94,55.55
  Bottom 0.305: v3.94,55.55 3.94,55.4 3.99,55.35 3.99,27.21 7.91,23.3 12.58,23.3 14.92,20.96 16.52,20.96 U$1.RD+
N$51
  Top 0.305: C38.2 6.03,34.98 8.06,32.95 16.49,32.95 20.13,29.31 20.13,23.69 U$1.RD-
N$52  (via drill 0.5 pad 1.3, 0.5 pad 1.5)
  Top 0.305: R43.1 7.35,51.83 | 7.35,51.83 R45.1 7.86,51.3 v7.86,45.14 | 7.35,51.83 8.67,50.51 C36.1 | v6.42,26.73 6.42,21.22 9.21,18.43 13.6,18.43 14.82,17.21 17.91,17.21 U$1.P5
  Bottom 0.305: v7.86,45.14 7.78,45.14 5.59,42.96 5.59,27.49 6.36,26.73 v6.42,26.73
N$54
  Top 0.61: LED1.A 109.25,44.45 R6.1
N$58
  Top 0.25: U1.31 31.83,54.99 33.53,56.7
  Top 0.305: R25.1 36.93,61.32 R26.1 34.03,62.48 34.04,62.49 33.61,62.92 31.78,62.92 30.97,62.11 30.97,60.53 31.43,60.08 32.49,60.08 33.53,59.03 33.53,56.7
N$60
  Top 0.25: U1.5 18,55.49 15.58,57.97
  Top 0.305: R40.2 11.88,57.97 15.58,57.97
N$61
  Top 0.25: U1.2 18.25,56.99 17.81,57.43
  Top 0.305: 17.81,57.43 17.81,57.92 18.5,58.6 18.5,61.6 17.79,62.31 17.63,62.41 R38.2
N$62
  Top 0.305: R39.2 16.52,64.65 19.41,61.75 19.41,57.62 U1.1
N$63
  Top 0.25: 32.92,54.49 U1.30
  Top 0.305: C23.2 35.58,51.96 Q9.1 33.38,54.03 | 33.38,54.03 32.92,54.49 | R26.2 34.3,59.35 34.3,54.94 33.38,54.03
RESET  (via drill 0.5 pad 1.3)
  Top 0.25: IC3.30 83.81,47.01 84.31,46.51 | U1.37 26.48,59.9 27.49,60.91
  Top 0.305: 84.31,46.51 R1.1 83.23,43.81 82.84,43.41 82.84,40.43 C7.1 83.71,39.44 84.84,38.31 85.54,38.31 86.2,37.65 90.89,37.65 92.68,35.86 | S1.2 S1.1 36.76,79.35 36.76,68.15 34.4,65.79 31.78,65.79 31.76,65.77 29.98,65.77 27.49,63.28 27.49,60.91 | JP1.5 92.68,35.86 | v94.04,36.76 93.58,36.76 92.68,35.86
  Bottom 0.305: S1.2 53.73,83.19 54.57,82.35 59.9,82.35 66.91,75.34 90.25,75.34 97.67,67.92 97.67,40.04 94.37,36.73 94.06,36.73 v94.04,36.76
RESET_RFID  (via drill 0.5 pad 1.3)
  Top 0.25: IC3.35 86.7,49.51 88.55,51.36
  Top 0.305: 88.55,51.36 96.14,51.36 98.53,48.98 98.53,40.95 126.22,13.26 126.91,13.26 v126.93,13.24
  Bottom 0.305: v126.93,13.24 150.93,13.24 156.24,7.93 SV1.7
RS  (via drill 0.5 pad 1.3)
  Top 0.25: IC3.16 76.18,40.6
  Top 0.305: 76.18,40.6 74.84,39.25 74.84,35.18 74.58,34.88 v74.38,34.88
  Bottom 0.305: v74.38,34.88 65.56,34.88 63.43,37.01 61.86,37.01 61.8,36.96 53.25,45.52 53.25,62.84 60.06,69.66 DIS1.4
RXN
  Top 0.305: C38.1 5.63,49.41 R45.2 2.65,51.82 2.39,52.07 2.39,59.19 3.71,60.51 R40.1
RXP
  Top 0.305: R43.2 7.35,57.6 R41.1 7.33,58.4 C35.1
SCL
  Top 0.25: IC3.43 85.28,53.51 90.05,58.27
  Top 0.305: IC1.6 102.72,58.25 | 102.72,58.25 99.24,58.25 99.22,58.27 90.05,58.27 | 102.72,58.25 102.72,60.6 R23.1
SDA  (via drill 0.5 pad 1.3)
  Top 0.25: IC3.44 84.41,54.01 90.02,59.62
  Top 0.305: 99.55,59.62 R18.1 | IC1.5 104.15,59.52 v104.09,59.57 | v101.12,59.62 99.55,59.62 | 90.02,59.62 99.55,59.62
  Bottom 0.305: v104.09,59.57 101.2,59.54 v101.12,59.62
TXN  (via drill 0.5 pad 1.5)
  Top 0.305: R39.1 10.18,67.49 9.81,67.49 | 9.81,67.49 R42.1 | 9.81,67.49 9.81,68.71 8.26,70.26 5.77,70.26 1.38,65.87 1.38,31.75 | 1.38,31.65 1.38,31.75 | 1.38,31.75 1.99,31.15 14.76,31.15 v15.04,30.87
  Bottom 0.305: U$1.TD- 16.54,29.37 v15.04,30.87
TXP  (via drill 0.5 pad 1.5)
  Top 0.305: R44.1 8.86,63.07 10.42,63.07 | R38.1 12.54,63.07 10.42,63.07 | v9.94,65.38 10.42,64.9 10.42,63.07
  Bottom 0.305: v9.94,65.38 9.89,65.44 4.12,65.44 2.55,63.86 2.55,26.29 9.18,19.66 U$1.TD+
V+  (via drill 0.5 pad 1.3)
  Top 0.25: U1.28 31.02,53.49 35.59,48.93
  Top 0.305: 35.59,48.93 35.59,48.92 | R36.2 16.13,70.73 R35.2 19.23,70.58 R34.2 | Q3.1 135.95,4.11 R8.2 137.46,2.6 158.02,2.65 158.81,3.66 158.78,3.69 SV1.8 158.78,28.27 150.91,36.15 120.57,36.15 R6.2 | Q6.1 47.82,27.68 R14.2 49.58,27.09 49.58,26.3 49.61,26.3 v49.59,26.18 | R9.2 60.95,30.74 | 60.95,30.74 60.95,30.55 Q4.1 | 60.95,30.74 61.52,30.17 v61.52,27.31 61.52,22.24 60.94,21.66 58.68,21.66 v54.89,25.45 | 86.31,10.11 R16.2 | Q7.1 119.06,11.18 122.46,11.18 125.46,8.18 125.46,2.77 | v65.36,27.49 65.36,28.3 65.68,28.62 Q5.1 80.97,26.14 R10.2 81.07,20.62 83.95,17.74 83.95,14.69 83.96,14.68 v84.1,14.68 | v84.33,11.86 86.29,11.86 Q8.1
  Top 0.406: U$1.G+ 15.45,5.44 24,5.44 U$1.Y+
  Top 0.508: U$2.4 48.41,15.77 48.41,10.39 47.4,9.38
  Top 0.61: 70.59,88.35 L3.2 72.83,87.24 DIS1.15 | C20.1 68.14,90.8 69.58,89.36 | 70.59,88.35 69.58,89.36 | C21.+ 69.28,88.35 70.59,88.35 | 35.59,48.92 C28.1 35.59,44.57 C30.1 37.37,42.21 37.37,26.36 | 35.59,48.93 42.45,48.93 43.07,49.42 R28.2 43.07,63.45 R27.2 39.62,72.86 43.64,76.89 43.64,79.13 45.32,80.8 49.08,80.8 51.01,82.73 51.01,87.43 | Q6.1 46.43,26.29 37.43,26.29 37.37,26.36 | R34.2 19.29,72.29 34.42,87.43 51.01,87.43 | 51.01,87.43 56.62,87.43 58.55,89.36 69.58,89.36 | Q8.1 86.31,10.11 | Q3.1 132.23,2.77 125.46,2.77 | 125.46,2.77 123.7,2.77 118.24,2.87 117.43,2.87 | 117.43,2.87 93.77,2.87 93.75,2.9 88.3,2.9 86.43,4.77 R16.2 | R15.2 117.43,2.87 | 125.46,2.97 125.46,2.77 | U$1.Y+ 27.94,9.38 37.4,9.38 | 37.4,9.38 38.64,9.38 | 38.64,9.38 47.4,9.38 | 38.64,9.38 39.17,8.85 C13.1 | 37.4,9.38 37.37,9.41 37.37,26.36
  Bottom 0.305: v65.36,27.49 61.78,27.46 v61.52,27.31 | v49.59,26.18 54.17,26.18 54.88,25.47 v54.88,25.46 v54.89,25.45 | v84.1,14.68 84.09,12.16 84.2,11.92 v84.33,11.86
VDD  (via drill 0.5 pad 1.3, 0.5 pad 1.5)
  Top 0.25: IC3.31 84.24,47.51 84.89,46.75 | IC3.10 73.18,34.32 | IC3.61 75.68,60.01 76.8,61.03 | 64.9,55.96 65.67,55.01 IC3.80
  Top 0.305: R23.2 103.59,63.16 R18.2 98.55,64.17 79.94,64.17 76.8,61.03 | 120.86,77.33 120.99,77.5 | R19.2 41.8,28.81 R20.2 41.8,32.91 43.11,34.22 46.9,34.22 49.66,31.3 | R11.2 128.04,8.11 | 128.04,8.11 R5.2 | 84.89,46.75 84.89,45.52 85.76,44.51 85.76,43.18 84.68,42.11 R1.2 84.93,41.48 v86.42,41.48 | 64.9,55.96 64.9,58.37 67.56,61.03 69.75,61.03 | 49.66,31.3 49.84,31.27 | 49.66,31.3 50.98,31.3 55.58,26.73 R12.2 57.4,24.91 v59.24,23.07 | 128.04,8.11 127.21,8.11 122.67,12.64 R21.2 115.36,12.64 v115.3,12.7 | R22.2 87.25,19.56 | 87.25,19.56 87.25,26.37 87.2,26.42 | 87.2,26.42 83.93,29.7 78.43,29.7 R13.2 77.23,30.27 73.18,34.32 | 87.2,26.42 88.35,27.56 93.28,27.56 | 93.28,27.56 v98.71,27.56 | 93.28,27.56 93.28,18.17 97.09,14.36 112.05,14.36 v112.58,13.77 | v85.25,19.72 87.1,19.72 87.25,19.56 | R17.2 85.31,34.02 91.22,34.02 v91.27,33.96 | 112.68,74.33 112.68,74.38 | v103.51,31.04 100.18,31.04 JP1.2
  Top 0.508: 54.93,76.46 54.93,72.12 DIS1.2
  Top 0.61: L2.1 62.73,117.17 C17.1 62.22,113.12 C18.+ 58.66,107.8 58.66,92.61 58.71,92.56 55.68,89.54 v55.68,89.44 | 54.93,76.46 57.06,78.55 58.43,79.89 R24.1 58.56,82.88 v55.68,85.76 | D1.A 122.46,77.5 120.99,77.5 115.81,77.5 112.68,74.38 103.59,65.28 103.59,63.16 | 76.8,61.03 69.75,61.03 69.09,61.69 v69.09,64.01 | DIS1.2 56.19,69.33 57,69.32 61.58,64.55 61.93,64.47 61.91,64.5 v61.63,64.55 | v114.33,72.67 112.68,74.33
  Bottom 0.305: v98.71,27.56 100.11,28.96 JP1.2 | v112.58,13.77 113.59,12.76 115.27,12.76 115.27,12.73 v115.3,12.7 | v59.24,23.07 66.4,23.07 69.25,25.91 70.49,25.91 76.69,19.72 v85.25,19.72 | v91.27,33.96 93.33,33.96 | 93.33,33.96 95.41,35.84 102.55,35.84 103.54,34.85 103.54,31.07 v103.51,31.04 | 114.28,72.67 114.31,72.67 v114.33,72.67 | 93.33,33.96 93.33,34.68 86.54,41.48 v86.42,41.48
  Bottom 0.61: v61.63,64.55 68.59,64.52 v69.09,64.01 | 102.55,35.84 107.83,41.2 113.98,41.2 119.34,46.56 126.32,46.56 127.82,48.06 127.82,59.16 114.31,72.67 | v55.68,89.44 v55.68,85.76
XTAL1
  Top 0.25: IC3.34 88.48,49.01
  Top 0.305: 88.48,49.01 Q2.1 90.33,48.93 C6.2
XTAL2
  Top 0.25: Q2.2 85.92,48.51 IC3.33
  Top 0.305: C5.2 93.06,45.06 Q2.2

## Text on the board
Top: RFID
Bottom: RFID